# Altium PCB CH32V30xW-R0-1v0.PcbDoc (part 2 of 2)
Units mil, origin at the board's own origin, x right, y up, seen from the top; angles counter-clockwise.
Board outline 3543.31 x 3070.87 mil, 2 copper layers (Top Layer, Bottom Layer); 66 components, 88 nets, 346 pads, 719 vias.
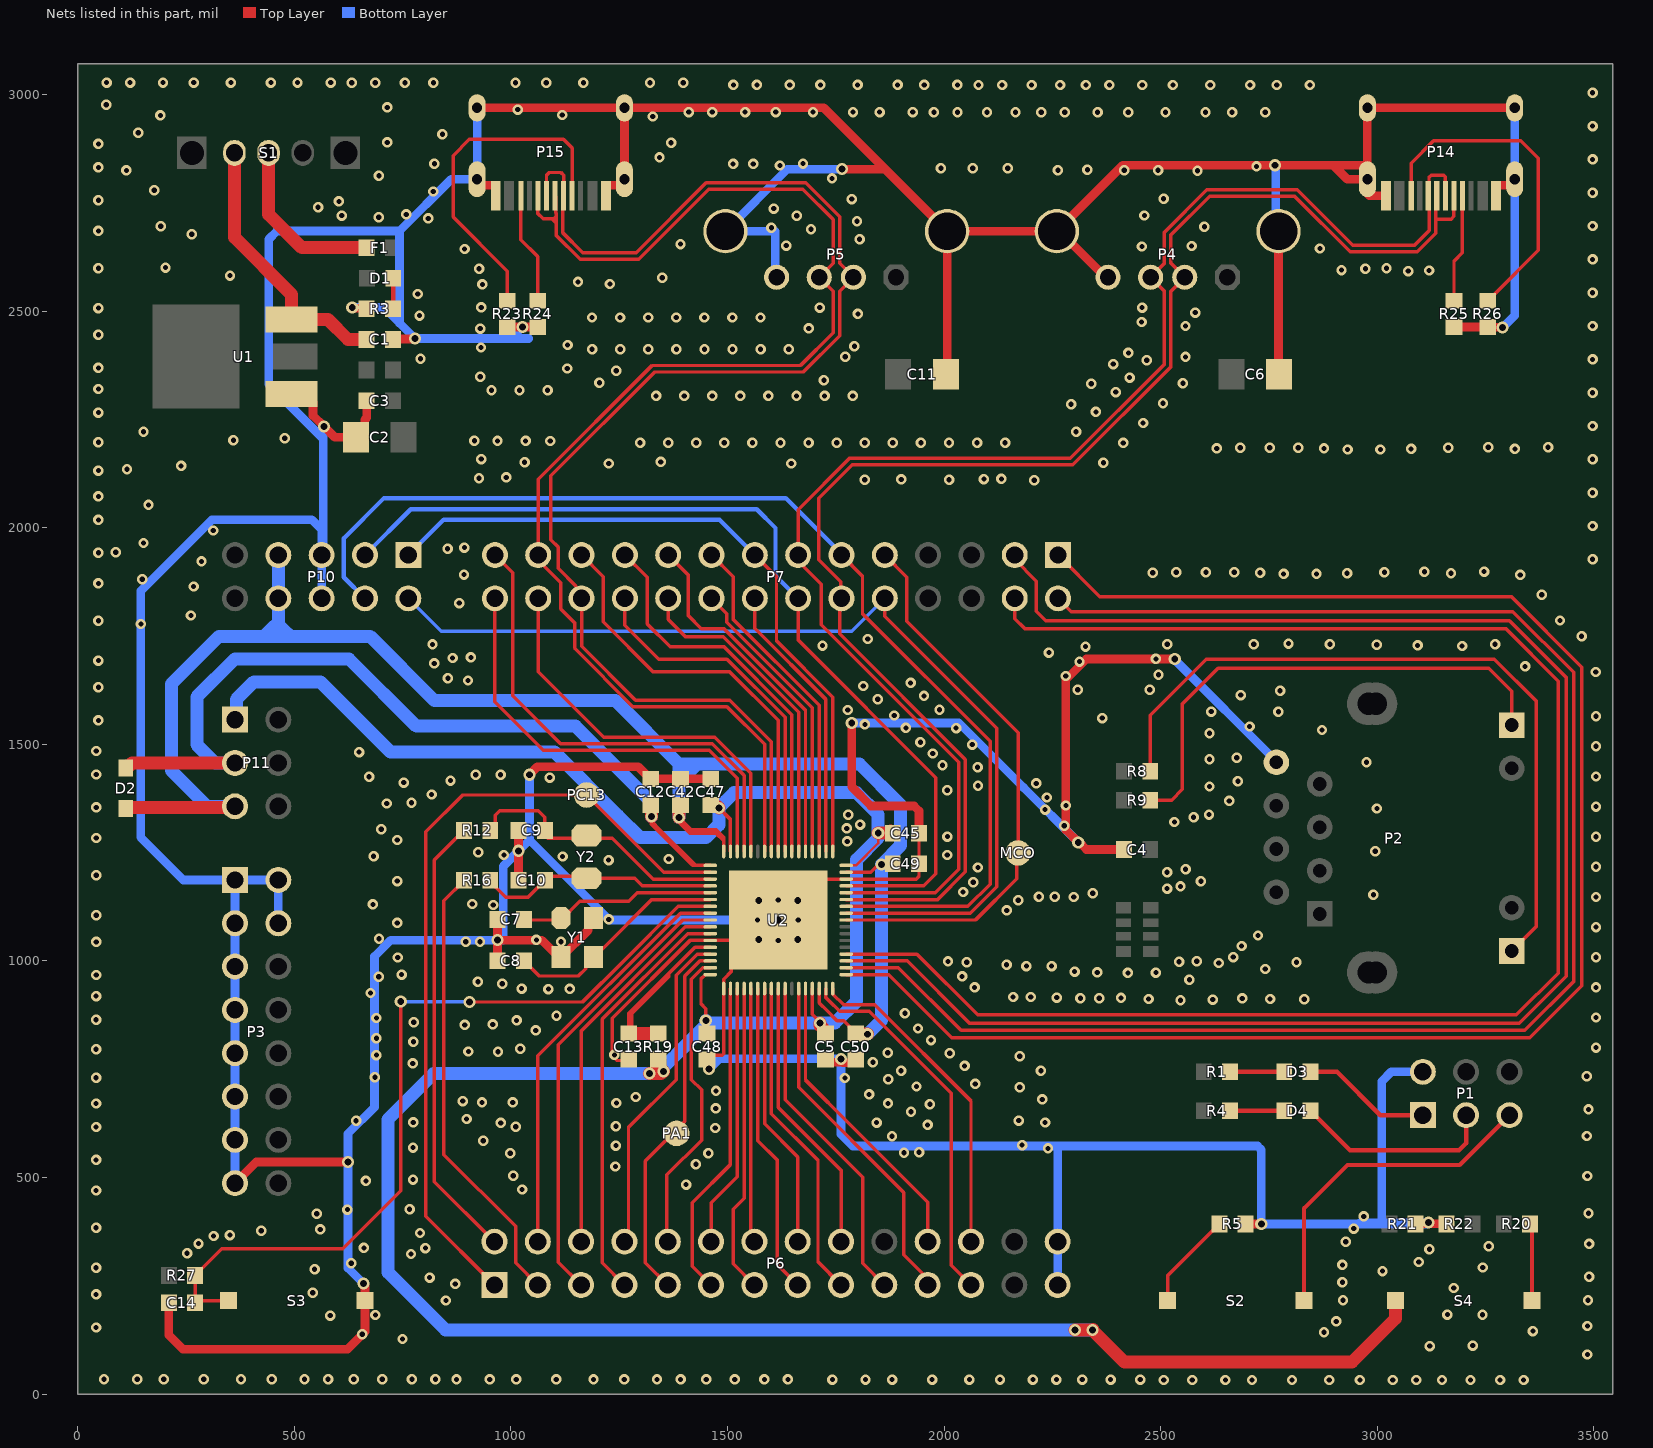
[diagram p2: the nets of this part, all layers, seen from the top]

## Via types
v1: diameter 24, hole 12, Top Layer to Bottom Layer, tented both sides, 662 vias
v2: diameter 28, hole 16, Top Layer to Bottom Layer, tented both sides, 57 vias

## Nets (pads, with @x,y where several pads share a name; then routed paths per layer and width w, separated by ;. In a path a pad name is that pad's centre, name@x,y a point inside that pad or via, vN(x,y) a via of type N, cw(c..) or ccw(c..) an arc to the next point about the centre after c; other vN are vias at no path point) (continued)
GND: C1.2 C2.2 C3.2 C4.1 C5.1 C6.2 C7.1 C8.1 C9.1 C10.1 C11.2 C12.1 C13.2 C14.1 C42.1 C45.2 C47.2 C48.2 C49.1 C50.2 P1.2 P2.8 P3.1 P3.2 P3.3 P3.4 P3.5 P3.7 P3.9 P3.11 P3.13 P3.15 P4.0 P4.4 P5.0 P5.4 P6.27 P6.28 P10.5 P10.6 P14.0 P14.A1 P14.B1 P15.0 P15.A1 P15.B1 R3.2 R5.1 R21.2 R22.2 R23.2 R24.2 R25.2 R26.2 S3.1 U1.1 U2.0 U2.12 U2.18 U2.49 Y1.2 Y1.4 | length 21484.4
  Top Layer w8: C13.2@1272.27,772.13 1270.31,770.17 1245.43,770.17 1234.02,781.57 1234.02,867.8 1413.47,1047.24 U2.12@1460.33,1047.24 U2.0@1569.86,1047.24 ; C48.2@1452.92,782.13 1487.61,782.13 1491.12,785.64 U2.18@1491.12,936.31 1491.12,957.77 1509.18,975.83 1509.18,986.56 U2.0@1569.86,1047.24 ; C45.2@1942.11,1294.49 C49.1@1942.11,1224.49 1942.11,1195.7 1935.38,1188.98 U2.49@1773.89,1188.98 1711.59,1188.98 U2.0@1662.12,1139.5 U2.0@1617.11,1094.49 U2.0@1572.09,1049.47 U2.0@1569.86,1047.24
  Top Layer w20: C14.1@210.37,211 210.37,136.41 243.22,103.56 622.7,103.56 663.07,143.93 S3.1@663.07,215.99 663.07,249.96 659.9,253.12 v2(659.9,255.29) ; P3.15@363.11,486.99 411.93,535.81 v2(624.09,535.81) ; U1.1@493.11,2309.25 523.11,2309.25 543.11,2289.25 543.11,2259.25 v2(568.33,2234.02) 593.56,2208.79 C2.2@642.33,2208.79 662.33,2228.79 662.33,2249.49 667.02,2254.18 C3.2@667.02,2293.47 ; v2(633.71,2508.57) 635.24,2507.04 665.35,2507.04 R3.2@667.02,2505.37 ; C1.2@727.65,2434.74 728.79,2435.87 777.31,2435.87 v2(778.45,2437.01) ; P15.0@921.95,2804.74 921.95,2799.95 930.9,2791 963.25,2791 965.06,2789.19 P15.B1@965.06,2766.56 ; P15.0@921.95,2969.31 P15.0@1262.11,2969.31 ; C8.1@969.2,1000.46 v2(969.2,1048.1) ; C7.1@969.2,1095.74 v2(969.2,1048.1) ; R23.2@991.75,2463.29 v2(1026.93,2463.29) R24.2@1062.11,2463.29 ; C10.1@1017.69,1193.12 v2(1017.69,1254.24) C9.1@1017.69,1283.12 ; v2(1042.76,1429.86) 1061.01,1448.12 1293.89,1448.12 1321.65,1420.35 C12.1@1322.64,1420.35 C42.1@1391.63,1420.35 C47.2@1461.63,1420.35 ; Y1.2@1115.58,1003.93 Y1.2@1115.58,1007.87 ; Y1.4@1190.39,1094.48 1178.73,1082.83 1178.73,1071.02 Y1.2@1115.58,1007.87 ; P15.A1@1219,2766.56 1219,2789.19 1220.81,2791 1253.16,2791 1262.11,2799.95 P15.0@1262.11,2804.74 P15.0@1262.11,2969.31 ; C48.2@1456.07,778.98 1456.07,751.9 v2(1457.6,750.37) ; C5.1@1726.06,772.13 1731.92,766.27 1761.87,766.27 v2@1761.87,769.2 ; v2(1761.87,774.01) v2@1761.87,769.2 ; v2(1764.46,2827.89) 1863.76,2827.89 P5.0@2007.11,2684.55 ; v2(1786.84,1549.38) 1786.84,1401.91 1831.17,1357.59 1930.74,1357.59 1942.11,1346.23 C45.2@1942.11,1294.49 ; C50.2@1796.06,772.13 1789.06,765.13 1765.94,765.13 v2@1761.87,769.2 ; C11.2@2004,2354.26 2007.11,2357.37 P5.0@2007.11,2684.55 ; P5.0@2037.11,2684.55 P4.0@2260.3,2684.55 ; P4.0@2300.3,2684.55 P4.0@2266.2,2684.55 ; P4.4@2378.41,2578.25 2372.5,2578.25 P4.0@2266.2,2684.55 ; C4.1@2415.29,1257.18 2328.53,1257.18 2311.92,1273.79 v2(2309.76,1273.79) 2281.19,1302.35 2281.19,1649.69 2328.49,1696.98 v2(2532.5,1696.98) ; R5.1@2696,392.95 2696.1,392.85 2732.18,392.85 v2(2732.28,392.75) ; P4.0@2772.11,2684.55 2772.11,2355.15 C6.2@2773,2354.26 ; P14.0@2968.44,2836.82 2898.44,2836.82 ; P14.0@2968.83,2804.07 2968.16,2804.74 2930.51,2804.74 2898.44,2836.82 ; P14.B1@3020.22,2766.56 2982.18,2766.56 2968.83,2779.9 2968.83,2796.47 P14.0@2977.11,2804.74 P14.0@2977.11,2969.31 P14.0@3317.26,2969.31 ; v2(3118.11,395.96) 3116.61,394.45 3090.13,394.45 R21.2@3088.63,392.95 R22.2@3159.37,392.95 ; R25.2@3177.11,2463.25 R26.2@3255.21,2463.25 3255.91,2462.55 3288.54,2462.55 v2(3289.24,2461.85) ; P14.A1@3274.15,2766.56 3274.15,2789.19 3275.96,2791 3308.32,2791 3317.26,2799.95 P14.0@3317.26,2804.74 ; v2(969.2,1048.1) 1071.41,1048.1 1099.99,1019.52 1103.93,1019.52 Y1.2@1115.58,1007.87 ; P15.0@1262.11,2969.31 1722.34,2969.31 P5.0@2007.11,2684.55 ; P4.0@2260.3,2684.55 P4.0@2266.2,2684.55 ; P4.0@2260.3,2684.55 2412.57,2836.82 v2(2764.24,2836.82) 2898.44,2836.82
  Bottom Layer w20: P3.15@363.11,486.99 P3.13@363.11,586.99 P3.11@363.11,686.99 P3.9@363.11,786.99 P3.7@363.11,886.99 P3.5@363.11,986.99 P3.3@363.11,1086.99 P3.1@363.11,1186.99 ; P3.4@463.11,1086.99 P3.2@463.11,1186.99 P3.1@363.11,1186.99 ; P10.6@563.11,1836.99 P10.5@563.11,1936.99 ; v2(568.33,2234.02) 566.8,2232.49 566.8,2205.35 ; v2(633.71,2508.57) 706.89,2508.57 742.67,2472.79 ; v2(659.9,255.29) 624.09,291.1 v2(624.09,535.81) 624.09,601.43 685.07,662.41 685.07,1010.31 722.86,1048.1 v2(969.2,1048.1) ; P15.0@921.95,2969.31 P15.0@921.95,2804.74 862.36,2804.74 742.67,2685.06 ; v2@982.2,1048.1 982.2,1218.76 v2(1017.69,1254.24) 1042.76,1279.31 ; v2(1026.93,2463.29) 1000.65,2437.01 ; 1040.65,2437.01 1000.65,2437.01 ; v2(1042.76,1429.86) 1042.76,1279.31 ; v2(1457.6,750.37) 1481.23,774.01 1761.85,774.01 1761.85,600.12 1789.22,572.75 2262.11,572.75 ; v1(1569.11,1094.49) 1227.58,1094.49 1042.76,1279.31 ; P5.4@1613.41,2578.25 1610.39,2581.26 1610.39,2684.55 P5.0@1495.3,2684.55 1638.64,2827.89 v2(1764.46,2827.89) ; v2(1786.84,1549.38) 2034.17,1549.38 2183.35,1400.19 v2(2309.76,1273.79) ; P6.27@2262.11,251.99 2262.11,572.75 ; v2(2532.5,1696.98) 2532.5,1695.04 2767.11,1460.43 P2.8@2767.11,1458.49 ; v2(2764.24,2836.82) 2765.77,2835.29 2765.77,2690.88 P4.0@2772.11,2684.55 ; 2959.96,395.96 3010.1,395.96 ; P1.2@3105.11,743.99 3032.36,743.99 3010.1,721.73 3010.1,395.96 ; v2(3118.11,395.96) v2@3115.94,395.96 ; v2(3289.24,2461.85) 3317.26,2489.88 P14.0@3317.26,2804.74 P14.0@3317.26,2969.31 ; P3.1@363.11,1186.99 243.46,1186.99 145.3,1285.15 145.3,1853.97 309.78,2018.45 540.61,2018.45 563.11,1995.95 P10.5@563.11,1936.99 ; P10.5@563.11,1936.99 566.8,1940.69 566.8,2205.35 ; 566.8,2205.35 441.19,2330.97 441.19,2666.23 460.01,2685.06 742.67,2685.06 ; 742.67,2472.79 v2(778.45,2437.01) 1000.65,2437.01 ; 742.67,2472.79 742.67,2685.06 ; 2262.11,572.75 2723.49,572.75 2732.28,563.96 v2(2732.28,392.75) 2959.96,392.75 3010.1,392.75 3112.74,392.75 v2@3115.94,395.96 ; 3010.1,395.96 v2@3115.94,395.96
  other v1: 2507.06,32.56 2572.8,32.56 2649.39,32.56 2710.83,32.56 2803.11,32.56 2889.07,32.56 2959.85,32.56 3035.7,32.56 3090.05,32.56 3149.46,32.56 3215.19,32.56 3283.45,32.56 3337.81,32.56 60.73,34.18 137.31,34.18 198.76,34.18 291.04,34.18 376.99,34.18 447.78,34.18 523.62,34.18 577.98,34.18 637.39,34.18 703.12,34.18 771.38,34.18 825.73,34.18 874.47,34.03 951.06,34.03 1012.5,34.03 1104.78,34.03 1190.73,34.03 1261.52,34.03 1337.37,34.03 1391.72,34.03 1451.13,34.03 1516.86,34.03 1585.12,34.03 1639.48,34.03 1742.05,33.56 1818.64,33.56 1880.08,33.56 1972.36,33.56 2058.32,33.56 2129.1,33.56 2204.95,33.56 2259.3,33.56 2318.71,33.56 2384.44,33.56 2452.7,33.56 3485.11,91.46 3120.94,110.98 3220.32,112.03 749.84,127.14 656.69,138.27 2876.95,143.05 3359.13,145.48 42.47,153.73 3485.11,157.2 2905.28,167.8 583,181.37 687.27,182.76 3242.93,183.02 3161.95,183.54 849.95,216.13 2920.83,216.77 3486.37,216.61 42.47,230.32 542.68,234.2 3176.68,245.07 871.57,254.51 2919.44,258.38 812.41,268.96 3488.9,270.96 3012.09,283.98 546.85,288.42 42.47,291.77 3243.46,292.39 2919.44,298.38 631.66,302.33 3095.7,305.01 769.45,323.53 252.63,325 3120.41,334.46 802.67,337.09 660.66,337.64 3257.13,341.29 278.74,347.48 3488.9,346.81 2927.06,351.7 313.74,365.07 351.27,367.07 790.16,371.85 423.81,377.22 560.1,380.17 2945.63,382.18 42.47,384.04 2968.96,410.27 551.78,416.22 3487.64,417.59 622.48,425.92 766.12,426.93 42.47,470 1025.93,472.46 1404.45,483.73 665.34,492.21 773.93,495.13 1005.24,504 3485.11,503.55 1241.27,525.51 1427.14,530.62 42.47,540.79 998.34,556.23 1455.88,555.83 1907.45,557.12 1942.29,558.3 2239.77,567.36 773.93,569.01 1242.31,573.74 2180.06,574.96 936.25,584.81 1879.69,595.5 3483.85,595.83 1471.51,614.31 42.47,616.63 1011.15,617.34 1242.31,618.21 1961.94,621.46 976.66,626.21 774.64,627.26 1844.26,626.8 2233.25,627.07 642.7,631.17 2172.47,631.41 897.81,635.08 1923.64,651.7 3487.53,657.27 1473.02,659.69 1967.32,669.17 42.47,670.98 1870.55,671.19 1243.64,671.97 933.29,673.51 1004.25,673.51 888.94,676.47 2226.74,680.26 1288.1,685.9 1826.87,692.02 1473.52,700.02 2174.64,708.48 1936.41,710.16 2071.76,716.08 1871.14,726.69 42.47,730.4 1771.1,729.65 686.15,731.32 3483.7,733.86 1900.79,746.45 2223.48,746.47 2047.3,757.68 773.32,763.58 1835.61,765.94 2174.64,780.12 689.58,782.72 1238.98,782.99 2013.04,787.04 1869.88,788.12 970.25,790.16 901.85,791 42.47,796.13 1021.44,797.29 3504.96,799.93 774.89,813.31 1969.82,817.21 689.58,821.55 1057.53,839.67 1939.64,844.13 893.46,852.26 958.08,853.52 775.52,858.64 1013.05,862.75 42.47,864.39 689.58,868.38 3504.96,869.48 1105.36,873.24 1909.47,879.2 2545.81,909.24 2620.32,910.65 2831.19,911.35 2472,912.05 2752.47,912.05 2688.5,913.46 2314.68,913.91 2358.04,913.91 2260.13,915.31 2408.4,914.61 2159.41,916.71 2199.98,916.71 42.47,918.74 675.83,926.05 1086.47,934.99 1136.07,935.47 1024.75,936.04 2070.38,939.01 3504.96,939.03 979.85,947.27 923.72,951.95 2566.29,956.65 694.85,963.46 2041.51,964.41 42.62,967.48 747.6,968.37 2424.36,972.5 2489.03,973.08 2353.33,973.65 2301.36,975.39 2741.38,981.44 2189.91,988.09 2248.24,988.09 2144.3,990.98 2633.91,995.35 2052.48,996.75 2813.44,996.93 2542.42,998.19 2008.97,998.85 2583.2,999.25 739.01,1007.98 2667.6,1008.83 3504.96,1008.57 2686.75,1034.36 42.62,1044.06 895.92,1044.42 928.6,1044.07 1115.58,1044.52 1617.11,1047.49 1058.83,1048.63 695.46,1051.17 2724.7,1058.83 3504.96,1078.12 737.5,1087.84 1663.11,1094.49 1226.04,1095.99 42.62,1105.51 2144.5,1116.72 959.11,1129.03 681.47,1130.44 910.72,1131.34 1617.11,1140.49 2171.18,1140.31 2218.89,1148.01 2255.32,1148.01 2299.44,1147.5 3504.96,1147.66 2991.1,1152.58 2343.04,1156.22 2043.9,1159.02 2514.9,1166.99 2545.69,1172.12 2067.17,1181.56 737.5,1184.26 2592.88,1183.92 42.62,1197.78 2514.9,1204.96 2557.48,1211.62 2077.93,1215.74 3504.96,1217.21 1225.42,1232.86 1364.48,1235.22 683.1,1241.47 1119.26,1241.02 983.73,1244.64 2007.07,1244.57 924.63,1251.06 2995.12,1253.25 1776.28,1275.89 737.5,1279.18 42.62,1283.74 2007.55,1287.06 3504.96,1286.76 700.92,1304.09 1775.49,1306.02 2277.53,1312.16 1806.04,1314.73 2531.69,1320.78 2576.07,1331.7 1778.55,1337.26 2611.58,1337.85 2233.14,1349.27 2999.15,1351.91 42.62,1354.53 3504.96,1356.3 2281.16,1358.73 713.4,1363.55 770.65,1365.06 2658.19,1369.5 2237.34,1377.35 816.86,1384.18 2007.07,1394.02 2612.73,1402.63 2078.28,1404.24 2212.65,1409.91 752.57,1411.76 2678.3,1414.75 860.51,1416.21 1089.61,1423.11 672.72,1425.32 3504.96,1425.85 42.62,1430.37 918.74,1430 976.21,1430 2077.28,1447.1 1996.32,1451.62 2974.99,1458.63 2612.73,1465.62 2675.79,1469.21 1973.86,1478.84 649.53,1482.19 42.62,1484.73 3504.96,1495.39 2065,1499.34 1945.27,1504.71 2612.73,1525.6 2872.3,1533.13 2027.64,1537.38 1911.75,1538.07 2705.17,1541.19 1817.19,1546.01 47.7,1555.19 2365.3,1560.68 3504.96,1564.94 1884.85,1566.57 2771.62,1575.42 2616.73,1575.59 1777.72,1579.31 1989.32,1580.07 1846.66,1603.98 1953.63,1611.8 2685.04,1613.67 2775.65,1623.74 2308.47,1625.84 2474.82,1625.84 47.7,1631.77 1813.22,1634.68 1922.7,1641.94 900.9,1647.33 854.6,1652.52 2280.74,1657.72 2494.98,1660.58 3504.2,1667.06 3341.26,1679.9 823.07,1686.84 2312.62,1690.99 47.7,1693.22 2488.96,1697.24 865.38,1699.22 907.68,1700.81 2241.92,1711.79 2326.49,1725.65 3195.7,1727.04 1719.4,1727.89 3093.12,1728.42 2998.85,1729.81 819.08,1730.75 2515.03,1731.2 2714.65,1731.2 2890.71,1731.2 3271.95,1731.2 2795.06,1732.58 1823.72,1743.12 3471.65,1749.4 145.78,1777.76 47.7,1785.5 3421.87,1785.77 261.34,1797.53 880.95,1825.96 3379.74,1845.13 267.43,1864.44 47.7,1871.45 148.82,1881.16 3329.96,1891.08 891.78,1891.82 2783.78,1893.54 2859.62,1893.54 2930.41,1894.8 3170.09,1894.91 2481.67,1896.07 2729.42,1896.07 2536.02,1897.33 2604.28,1897.33 2670.01,1897.33 3016.37,1897.33 3108.64,1898.6 3246.68,1898.74 285.67,1922.22 3496.95,1927.08 47.7,1942.24 87.99,1943.51 853.89,1951.36 892.68,1954.07 151.86,1964.8 313.04,1993.69 3496.95,2004.02 47.7,2018.08 163.38,2052.8 47.7,2072.44 3496.95,2080.95 2208,2109.71 1817.04,2110.74 2011.51,2110.74 1901,2111.58 2091.92,2112.34 2132.37,2112.86 926.43,2114.17 989.28,2116.23 47.7,2131.85 113.84,2135.1 238.55,2142.79 1225.66,2148.22 1647.11,2148.22 2367.81,2150.02 1031.52,2151.27 1345.89,2152.01 931.58,2158.48 3496.95,2157.89 2931.38,2180.69 3007.22,2180.69 3078.01,2181.95 3317.69,2182.06 2629.27,2183.22 2877.02,2183.22 2683.62,2184.48 2751.88,2184.48 2817.61,2184.48 3163.97,2184.48 3256.24,2185.75 3394.28,2185.89 1298.19,2196.22 1363.02,2196.22 1427.85,2196.22 1492.67,2196.22 1557.5,2196.22 1622.32,2196.22 1687.15,2196.22 1751.97,2196.22 1816.8,2196.22 1881.63,2196.22 1946.45,2196.22 2011.28,2196.22 2076.1,2196.22 2140.93,2196.22 2413.65,2195.85 47.7,2197.58 1090.61,2200.27 915.74,2200.69 969.02,2200.58 1033.85,2200.58 359.29,2202.02 477.75,2206.57 151.86,2221.78 2304.69,2221.54 3496.95,2234.83 2459.49,2241.69 47.7,2265.84 2350.53,2267.38 2293.14,2285.07 2505.32,2287.53 1335.14,2304.3 1399.97,2304.3 1464.79,2304.3 1529.62,2304.3 1594.44,2304.3 1659.27,2304.3 1724.1,2304.3 1788.92,2304.3 3496.95,2311.77 2396.37,2313.22 955.1,2317.45 1019.92,2317.45 1084.75,2317.45 47.7,2320.19 2339.73,2332.24 2551.16,2333.37 1204.34,2334.67 1722.46,2340.28 2428.31,2346.62 929.22,2348.4 1243.24,2362.33 1130,2367.51 47.86,2368.93 2390.35,2377.68 2468,2386.88 3496.95,2388.71 791.39,2389.95 2557.16,2394.36 1771.92,2394.83 2425.43,2403.56 1187.49,2412.17 1252.31,2412.17 1317.14,2412.17 1381.96,2412.17 1446.79,2412.17 1511.62,2412.17 1576.44,2412.17 1641.27,2412.17 931.01,2416.13 1793.01,2418.83 1130.86,2421.97 47.86,2445.52 929.34,2459.72 1687.56,2460.28 2557.16,2465.69 3496.95,2465.65 2455.92,2474.89 1187.26,2485.28 1252.09,2485.28 1316.91,2485.28 1381.74,2485.28 1446.56,2485.28 1511.39,2485.28 1576.22,2485.28 788.89,2489.68 1801.01,2493.74 2579.73,2496.58 47.86,2506.96 1713.01,2508.28 2457.07,2508.25 931.44,2508.59 785.15,2539.55 3496.95,2542.59 934.23,2561.66 1228.52,2562.6 1154.92,2567.41 1349.59,2577.04 351.67,2582.07 3071.71,2592.5 3119.64,2593.82 2917.38,2594.77 926.57,2597.83 2972.57,2598.1 47.86,2599.24 3021.31,2598.96 202.63,2600.47 3496.95,2619.53 893.03,2643.36 2867.46,2644.69 2456.69,2649.23 2571.29,2650.37 1635.74,2651.33 1391.55,2654.77 1805.05,2665.78 263.35,2677.75 47.86,2685.19 1692.83,2689.17 1601.35,2692.61 2600.8,2694.62 191.59,2696.14 3496.95,2696.47 1798.97,2707.6 809.39,2714.01 695.08,2716.8 1659.82,2720.12 609.57,2720.52 2462.36,2720.72 758.27,2723.31 1606.85,2736.63 554.86,2739.98 603.01,2753.29 47.86,2755.98 1786.8,2758.55 2506.61,2759.3 3496.95,2773.4 820.54,2776.28 176.87,2778.94 1741.17,2806.46 695.2,2812.71 2584.91,2823.98 112.48,2824.94 2262.65,2825.11 2415.84,2825.11 2494.13,2825.11 2330.73,2826.25 1992.59,2829.65 2066.34,2829.65 2146.91,2829.65 47.86,2831.83 2721.08,2834.19 1621.02,2836.12 823.33,2840.41 1513.04,2839.92 1559.43,2839.92 1674.26,2840.68 3496.95,2850.34 1342.95,2854.99 47.86,2886.18 1369.88,2888.65 714.66,2889.53 841.92,2908.26 139.68,2911.7 3496.95,2927.28 1327.24,2949.25 190.99,2951.86 1118.51,2952.85 1410.53,2959.48 1464.89,2959.48 1540.73,2959.48 1611.52,2959.48 1697.48,2959.48 1789.75,2959.48 1851.2,2959.48 1927.78,2959.48 1976.52,2959.32 2030.87,2959.32 2099.13,2959.32 2164.87,2959.32 2224.28,2959.32 2278.63,2959.32 2354.47,2959.32 2425.26,2959.32 2511.22,2959.32 2603.5,2959.32 2664.94,2959.32 2741.53,2959.32 1015.64,2965.24 714.66,2970.46 66.07,2976.4 3496.95,3004.22 1513.51,3022.31 1567.86,3022.31 1643.7,3022.31 1714.49,3022.31 1800.45,3022.31 1892.72,3022.31 1954.17,3022.31 2030.76,3022.31 2079.49,3022.15 2133.85,3022.15 2202.11,3022.15 2267.84,3022.15 2327.25,3022.15 2381.6,3022.15 2457.45,3022.15 2528.23,3022.15 2614.19,3022.15 2706.47,3022.15 2767.91,3022.15 2844.5,3022.15 632.66,3027.39 687.02,3027.39 755.28,3027.39 821.01,3027.39 1010.62,3027.39 1081.4,3027.39 1167.36,3027.39 1321.08,3027.39 1397.67,3027.39 66.68,3027.54 121.03,3027.54 196.87,3027.54 267.66,3027.54 353.62,3027.54 445.89,3027.54 507.34,3027.54 583.93,3027.54
KEY: P1.5 S2.1 | length 776.3
  Top Layer w10: S2.1@2830.75,215.99 2830.75,428.73 2931.07,529.05 3190.16,529.05 P1.5@3305.11,643.99
LED1: D3.2 P1.1 | length 300.8
  Top Layer w10: D3.2@2845.74,743.99 2907.08,743.99 3007.08,643.99 P1.1@3105.11,643.99
LED2: D4.2 P1.3 | length 469.3
  Top Layer w10: D4.2@2845.74,653.99 2845.74,653 2859.04,639.7 2860.03,639.7 2936.97,562.75 3188.6,562.75 3205.04,579.19 3205.04,643.92 P1.3@3205.11,643.99
MCO: MCO.1 P7.9 U2.43 | length 1308.1
  Top Layer w8: U2.43@1773.89,1094.49 2072.5,1094.49 2167.96,1189.95 MCO.1@2167.96,1249.31 ; P7.9@1863.11,1936.99 1914.04,1886.05 1914.04,1783.72 2170.88,1526.89 MCO.1@2170.88,1249.31
NetC1_1: C1.1 S1.2 U1.3 | length 631.7
  Top Layer w30: S1.2@361.84,2865.37 361.84,2670.28 493.11,2539.01 U1.3@493.11,2481.25 577.27,2481.25 623.79,2434.74 C1.1@667.02,2434.74
NetD1_2: D1.2 R3.1 | length 70.9
  Top Layer w10: R3.1@727.65,2505.37 728.34,2506.06 D1.2@728.34,2576.01
NetD3_1: D3.1 R1.2 | length 125
  Top Layer w10: R1.2@2660.11,743.99 D3.1@2785.11,743.99
NetD4_1: D4.1 R4.2 | length 125
  Top Layer w10: R4.2@2660.11,653.99 D4.1@2785.11,653.99
NetF1_2: F1.2 S1.1 | length 400.1
  Top Layer w30: S1.1@440.58,2865.37 440.58,2723.61 517.54,2646.64 F1.2@667.02,2646.64
NetP2_9: P2.9 R8.2 | length 1714.5
  Top Layer w8: R8.2@2475.92,1437.8 2475.92,1566.82 2605.47,1696.37 3270.22,1696.37 3367.43,1599.15 3367.43,1080.2 P2.9@3310.1,1022.86
NetP2_12: P2.12 R9.2 | length 1175.7
  Top Layer w8: R9.2@2475.92,1371.1 2525.16,1371.1 2550.19,1396.13 2550.19,1593.2 2632.28,1675.3 3257.63,1675.3 3310.1,1622.83 P2.12@3310.1,1544.52
NetP14_A5: P14.A5 R25.1 | length 250.7
  Top Layer w8: R25.1@3177.11,2523.88 3177.11,2615.23 3196.4,2634.52 P14.A5@3196.4,2766.56
NetP14_B5: P14.B5 R26.1 | length 784.8
  Top Layer w8: P14.B5@3078.29,2766.56 3078.29,2841.75 3129.85,2893.31 3331.37,2893.31 3371.97,2852.71 3371.97,2640.65 3270.5,2539.17 3270.5,2538.19 3256.19,2523.88 R26.1@3255.21,2523.88
NetP15_A5: P15.A5 R23.1 | length 795.6
  Top Layer w8: R23.1@991.75,2523.92 991.75,2592.05 866.48,2717.32 866.48,2859.12 903.81,2896.45 1121.38,2896.45 1141.24,2876.58 P15.A5@1141.24,2766.56
NetP15_B5: P15.B5 R24.1 | length 258.8
  Top Layer w8: P15.B5@1023.13,2766.56 1023.13,2665.15 1062.11,2626.17 R24.1@1062.11,2523.92
NetR5_2: R5.2 S2.2 | length 227.1
  Top Layer w8: S2.2@2515.79,215.99 2515.79,273.37 2620.08,377.66 2621.06,377.66 2635.37,391.96 R5.2@2635.37,392.95
NetR20_2: R20.2 S4.2 | length 178.8
  Top Layer w10: R20.2@3352.49,392.95 3356.96,388.48 S4.2@3356.96,215.99
NRST: C14.2 R27.1 S3.2 U2.7 | length 1942
  Top Layer w8: S3.2@348.11,215.99 275.99,215.99 C14.2@271,211 R27.1@271,274 271,274.98 285.31,289.29 286.29,289.29 332.57,335.57 611.38,335.57 745.76,469.95 v2(745.76,906.68) ; v2(904.17,905.2) 1165.36,905.2 1258.66,998.5 1386.14,1125.98 U2.7@1460.33,1125.98
  Bottom Layer w8: v2(745.76,906.68) 746.5,905.94 903.43,905.94 v2(904.17,905.2)
PA0: P6.8 U2.14 | length 763.4
  Top Layer w8: P6.8@1262.11,351.99 1271.5,361.38 1271.5,615.83 1381.5,725.83 1381.5,966.78 1430.46,1015.75 U2.14@1460.33,1015.75
PA1: P6.9 PA1.1 U2.15 | length 845.4
  Top Layer w8: P6.9@1362.11,251.99 1310.47,303.62 1310.47,538.2 1401.73,629.46 1401.73,965.15 1436.58,1000 U2.15@1460.33,1000
PA2: P6.10 U2.16 | length 704.4
  Top Layer w8: P6.10@1360.15,350.87 1360.15,505.98 1440.25,586.08 1440.25,702.51 1416.73,726.03 1416.73,957.85 1443.08,984.19 1460.26,984.19 U2.16@1460.33,984.25
PA3: P6.11 U2.19 | length 738.8
  Top Layer w8: P6.11@1462.11,251.99 1418.74,295.35 1418.74,442.06 1506.87,530.19 U2.19@1506.87,936.31
PA4: P6.12 U2.20 | length 609.4
  Top Layer w8: P6.12@1462.11,351.99 1462.11,441.56 1522.62,502.08 U2.20@1522.62,936.31
PA5: P6.13 U2.21 | length 715
  Top Layer w8: U2.21@1538.37,936.31 1538.37,452.22 1513.15,427.01 1513.15,300.95 P6.13@1562.11,251.99
PA6: P6.14 U2.22 | length 587.6
  Top Layer w8: U2.22@1554.11,936.31 1554.18,936.24 1554.18,359.92 P6.14@1562.11,351.99
PA7: P6.15 U2.23 | length 722.5
  Top Layer w8: U2.23@1569.86,936.31 1569.86,585.1 1615.35,539.61 1615.35,298.74 P6.15@1662.11,251.99
PA9: P7.10 P10.2 U2.44 | length 2308.7
  Top Layer w8: U2.44@1773.89,1110.24 2060.39,1110.24 2121.3,1171.15 2121.3,1537.51 1863.11,1795.7 P7.10@1863.11,1836.99
  Bottom Layer w8: P10.2@763.11,1836.99 839.48,1760.61 1786.73,1760.61 P7.10@1863.11,1836.99
PA10: P7.11 P10.4 U2.45 | length 2657.7
  Top Layer w8: P7.11@1763.11,1936.99 1811.65,1888.44 1811.65,1801.76 2106.3,1507.11 2106.3,1177.36 2054.93,1125.98 U2.45@1773.89,1125.98
  Bottom Layer w10: P10.4@663.11,1836.99 614.17,1885.93 614.17,1975.39 707.23,2068.46 1634.38,2068.46 1763.11,1939.73 P7.11@1763.11,1936.99
PA11: P4.2 P7.12 P14.A7 P14.B7 U2.46 | length 3476.6
  Top Layer w8: U2.46@1773.89,1141.73 1985.22,1141.73 2049.07,1205.58 2049.07,1464.93 1758.92,1755.07 1758.92,1832.8 P7.12@1763.11,1836.99 1761.88,1838.22 1761.88,1874.99 1710.37,1926.5 1710.37,2067.66 1787.74,2145.03 2297.34,2145.03 2523.7,2371.39 2523.7,2546.38 P4.2@2555.57,2578.25 2523.7,2610.12 2523.7,2676.18 2612.99,2765.47 2808.98,2765.47 2937.21,2637.24 3092.22,2637.24 3135,2680.02 3135,2712.31 ; P14.A7@3137.34,2766.56 3135.44,2764.65 3135.44,2727.01 3135,2726.57 3135,2712.31 ; P14.B7@3176.71,2766.56 3176.71,2718.74 3170.28,2712.31 3143.56,2712.31 3140.1,2712.31 3135,2712.31
PA12: P4.3 P7.13 P14.A6 P14.B6 U2.47 | length 3509.4
  Top Layer w8: U2.47@1773.89,1157.48 1785.57,1157.48 1785.95,1157.11 1979.38,1157.11 2034.07,1211.79 2034.07,1458.71 1716.87,1775.9 1716.87,1788.52 1716.37,1789.02 1716.37,1869.3 1676.77,1908.91 1676.77,1909.26 1663.11,1922.92 1663.11,2041.61 1781.52,2160.03 2291.13,2160.03 2508.7,2377.6 2508.7,2546.38 P4.3@2476.83,2578.25 2508.7,2610.12 2508.7,2682.39 2606.78,2780.47 2815.2,2780.47 2943.43,2652.24 3086.01,2652.24 3120,2686.23 3120,2726.57 3119.56,2727.01 3119.56,2764.65 3119.42,2764.79 3119.42,2809 3124.25,2813.84 3153.51,2813.84 3157.03,2810.32 P14.A6@3157.03,2766.56
PA13: P7.14 P10.3 U2.48 | length 2179.4
  Top Layer w8: P7.14@1663.11,1836.99 1663.11,1740.77 1980.75,1423.13 1980.75,1201.2 1952.77,1173.23 U2.48@1773.89,1173.23
  Bottom Layer w10: P10.3@663.11,1936.99 768.84,2042.73 1567.54,2042.73 1610.96,1999.31 1610.96,1889.14 P7.14@1663.11,1836.99
PA14: P7.15 P10.1 U2.52 | length 1626.5
  Top Layer w8: P7.15@1563.11,1936.99 1613.14,1886.96 1613.14,1738.89 1743.09,1608.94 U2.52@1743.09,1252.67
  Bottom Layer w10: P10.1@763.11,1936.99 844.72,2018.61 1481.49,2018.61 P7.15@1563.11,1936.99
PA15: P7.16 U2.53 | length 652.3
  Top Layer w8: P7.16@1563.11,1836.99 1563.11,1767.71 1727.34,1603.48 U2.53@1727.34,1252.67
PB0: P6.18 U2.26 | length 644.4
  Top Layer w8: U2.26@1617.11,936.31 1617.11,661.71 1762.11,516.71 P6.18@1762.11,351.99
PB1: P6.19 U2.27 | length 779.3
  Top Layer w8: U2.27@1632.85,936.31 1632.85,679.74 1811.97,500.63 1811.97,302.13 P6.19@1862.11,251.99
PB3: P7.21 U2.58 | length 916.9
  Top Layer w8: P7.21@1263.11,1936.99 1314.58,1885.52 1314.58,1777.86 1367.6,1724.83 1492,1724.83 1648.6,1568.23 U2.58@1648.6,1252.67
PB4: P7.22 U2.59 | length 829.7
  Top Layer w8: P7.22@1263.11,1836.99 1263.11,1775.15 1341.48,1696.78 1498.84,1696.78 1632.85,1562.77 U2.59@1632.85,1252.67
PB5: P7.23 U2.60 | length 975.8
  Top Layer w8: P7.23@1163.11,1936.99 1213.03,1887.07 1213.03,1783.1 1329.05,1667.08 1505.54,1667.08 1617.11,1555.52 U2.60@1617.11,1252.67
PB6: P5.2 P7.24 P15.A7 P15.B7 U2.61 | length 3290.1
  Top Layer w8: P15.A7@1082.18,2766.56 1082.18,2814.09 1088.16,2820.07 1115.54,2820.07 1121.56,2814.06 P15.B7@1121.56,2766.56 1119.65,2764.65 1119.65,2727.01 1119.21,2726.57 1119.21,2713.28 1119.21,2681.53 1165.97,2634.77 1288.95,2634.77 1450.37,2796.18 1680.19,2796.18 1758.7,2717.68 1758.7,2610.12 P5.2@1790.57,2578.25 1758.7,2546.38 1758.7,2443.56 1674.7,2359.56 1331.95,2359.56 1092.18,2119.79 1092.18,1972.66 1109.26,1955.58 1109.26,1906.13 1149.88,1865.51 1149.88,1864.28 1163.11,1851.06 1163.11,1726.61 1287.69,1602.03 1505.01,1602.03 1600.98,1506.05 1600.98,1264.73 1601.36,1264.35 U2.61@1601.36,1252.67
PB7: P5.3 P7.25 P15.A6 P15.B6 U2.62 | length 3258.5
  Top Layer w8: P15.B6@1062.5,2766.56 1062.5,2725.11 1074.33,2713.28 1094.91,2713.28 ; P7.25@1063.11,1925.03 1115.05,1873.08 1115.05,1812.39 1146.91,1780.54 1146.91,1722.42 1148.11,1721.22 1148.11,1720.4 1281.48,1587.03 1498.79,1587.03 1585.98,1499.84 1585.98,1264.73 1585.61,1264.35 U2.62@1585.61,1252.67 ; P7.25@1063.11,1936.99 1062.97,1937.12 1062.97,2111.8 1325.74,2374.56 1668.48,2374.56 1743.7,2449.78 1743.7,2546.38 P5.3@1711.83,2578.25 1743.7,2610.12 1743.7,2711.46 1673.98,2781.18 1456.58,2781.18 1295.17,2619.77 1159.76,2619.77 1104.21,2675.32 1104.21,2704.22 1104.21,2713.28 ; P15.A6@1101.87,2766.56 1103.78,2764.65 1103.78,2727.01 1104.21,2726.57 1104.21,2718.28 1104.21,2713.28 ; 1103.36,2718.28 1098.36,2713.28 ; 1103.97,2704.22 1094.91,2713.28 ; 1094.91,2713.28 1098.36,2713.28 ; 1098.36,2713.28 1104.21,2713.28
PB8: P7.26 U2.64 | length 938.1
  Top Layer w8: P7.26@1063.11,1836.99 1063.11,1667.85 1214.18,1516.78 1470.87,1516.78 1554.11,1433.54 U2.64@1554.11,1252.67
PB9: P7.27 U2.65 | length 1127.7
  Top Layer w8: P7.27@963.11,1936.99 1004.11,1895.99 1004.11,1612.15 1114.48,1501.78 1464.66,1501.78 1538.37,1428.07 U2.65@1538.37,1252.67
PB10: P6.21 U2.29 | length 807.7
  Top Layer w8: U2.29@1664.35,936.31 1664.35,708.01 1906.9,465.46 1906.9,321.37 1948.33,279.95 1948.33,279.84 1962.11,266.06 P6.21@1962.11,251.99
PB11: P6.22 U2.30 | length 701.1
  Top Layer w8: U2.30@1680.1,936.31 1680.1,725.18 1787.28,617.99 1962.11,443.17 P6.22@1962.11,351.99
PB12: P7.1 U2.35 | length 3859.6
  Top Layer w8: U2.35@1773.89,968.5 1872.31,968.5 2017.75,823.07 3352.28,823.07 3472.14,942.93 3472.14,1678.18 3309.87,1840.45 2359.64,1840.45 P7.1@2263.11,1936.99
PB13: P7.2 U2.36 | length 3760.2
  Top Layer w8: U2.36@1773.89,984.25 1894.45,984.25 2039.06,839.64 3340.29,839.64 3453.08,952.43 3453.08,1666.1 3313.04,1806.15 2293.95,1806.15 P7.2@2263.11,1836.99
PB14: P7.3 U2.37 | length 3893.6
  Top Layer w8: U2.37@1773.89,1000 1914.75,1000 2058.54,856.21 3327.92,856.21 3436.2,964.49 3436.2,1654.35 3305.17,1785.39 2234.75,1785.39 2212.99,1807.14 2212.99,1876.93 2163.11,1926.82 P7.3@2163.11,1936.99
PB15: P7.4 U2.38 | length 3776.9
  Top Layer w8: U2.38@1773.89,1015.75 1937.34,1015.75 2077.65,875.44 3321.25,875.44 3417.54,971.73 3417.54,1645.89 3296.1,1767.33 2185.84,1767.33 2163.11,1790.06 P7.4@2163.11,1836.99
PC0: P6.4 U2.8 | length 963.4
  Top Layer w8: P6.4@1062.11,351.99 1062.11,780.73 1391.61,1110.24 U2.8@1460.33,1110.24
PC1: P6.5 U2.9 | length 1046.6
  Top Layer w8: P6.5@1162.11,251.99 1109.53,304.57 1109.53,806.94 1397.08,1094.49 U2.9@1460.33,1094.49
PC2: P6.6 U2.10 | length 884.1
  Top Layer w8: P6.6@1162.11,351.99 1162.11,838.31 1402.54,1078.74 U2.10@1460.33,1078.74
PC3: P6.7 U2.11 | length 966.2
  Top Layer w8: P6.7@1262.11,251.99 1210.87,303.23 1210.87,865.85 1408.01,1062.99 U2.11@1460.33,1062.99
PC4: P6.16 U2.24 | length 616
  Top Layer w8: U2.24@1585.61,936.31 1585.61,623.92 1662.11,547.42 P6.16@1662.11,351.99
PC5: P6.17 U2.25 | length 750.9
  Top Layer w8: U2.25@1601.36,936.31 1601.36,647.15 1708.9,539.61 1708.9,305.2 P6.17@1762.11,251.99
PC10: P7.17 U2.54 | length 787.2
  Top Layer w8: P7.17@1463.11,1936.99 1513.6,1886.49 1513.6,1788.09 1711.59,1590.09 U2.54@1711.59,1252.67
PC11: P7.18 U2.55 | length 680.7
  Top Layer w8: P7.18@1463.11,1836.99 1498.6,1801.49 1498.6,1781.87 1695.85,1584.63 U2.55@1695.85,1252.67
PC12: P7.19 U2.56 | length 846.3
  Top Layer w8: P7.19@1363.11,1936.99 1409.89,1890.2 1409.89,1796.99 1439.65,1767.23 1492.03,1767.23 1680.1,1579.16 U2.56@1680.1,1252.67
PC13: P6.1 PC13.1 U2.2 | length 1877.5
  Top Layer w8: P6.1@962.11,251.99 803.78,410.32 803.78,1298.03 888.84,1383.09 PC13.1@1174.94,1383.09 1174.94,1382.69 1352.91,1204.72 U2.2@1460.33,1204.72
PC14: P6.2 R12.1 | length 1035.6
  Top Layer w8: R12.1@891.69,1301.31 891.69,1300.32 877.38,1286.02 876.4,1286.02 823.42,1233.04 823.42,490.67 P6.2@962.11,351.99
PC15: P6.3 R16.1 | length 1047.5
  Top Layer w8: R16.1@884.72,1189.16 R16.1@887.69,1192.13 ; R16.1@891.69,1186.19 891.69,1185.21 845.2,1138.72 845.2,552.88 1010.79,387.29 1010.79,303.31 P6.3@1062.11,251.99
PD2: P7.20 U2.57 | length 759.9
  Top Layer w8: P7.20@1363.11,1836.99 1363.11,1788.18 1402.97,1748.32 1489.73,1748.32 1664.35,1573.7 U2.57@1664.35,1252.67
PD8: P6.23 U2.33 | length 863
  Top Layer w8: U2.33@1727.34,936.31 1727.34,915.4 1735.39,907.35 1759.34,883.41 1827.62,883.41 2016.38,694.65 2016.38,297.72 P6.23@2062.11,251.99
PD9: P6.24 U2.34 | length 758.7
  Top Layer w8: U2.34@1743.09,936.31 1743.09,923.53 1768.21,898.41 1840.33,898.41 2062.11,676.63 P6.24@2062.11,351.99
PE0: P7.28 U2.66 | length 1040.3
  Top Layer w8: P7.28@963.11,1836.99 963.11,1598.71 1075.03,1486.78 1457.75,1486.78 1522.62,1421.92 U2.66@1522.62,1252.67
VBAT: C12.2 D2.1 P11.3 U2.1 | length 2133.5
  Top Layer w8: C12.2@1322.64,1359.72 v2@1322.64,1333.81 ; U2.1@1460.33,1220.47 1426.54,1220.47 ; v2@1322.64,1333.81 1324.4,1332.05 v2@1324.4,1323.34 ; v2@1322.64,1333.81 1322.64,1325.1 v2@1324.4,1323.34 ; v2@1324.4,1323.34 1324.4,1315.33 1419.26,1220.47 1426.54,1220.47 ; v2@1324.4,1323.34 1333.32,1314.42 1333.32,1313.69 1426.54,1220.47
  Top Layer w30: D2.1@111,1444.91 111,1448.26 112.34,1449.6 118.13,1449.6 125.52,1456.99 P11.3@363.11,1456.99 ; C12.2@1322.64,1359.72 1324.27,1358.08 v2(1324.27,1333.81)
  Bottom Layer w30: P11.3@363.11,1456.99 317.49,1456.99 275.09,1499.38 275.09,1609.74 362.55,1697.19 626.14,1697.19 781.52,1541.81 1149.21,1541.81 1324.27,1366.74 v2(1324.27,1333.81)
VDD: C42.2 C49.2 C50.1 D2.2 P10.7 P10.8 P11.5 U2.32 U2.50 U2.68 | length 4101.1
  Top Layer w8: v2@1388.19,1319.36 1389.09,1319.36 1413.31,1295.14 1473.24,1295.14 1491.12,1277.26 ; C42.2@1391.63,1359.72 1391.63,1327.45 1416.73,1302.35 1474.36,1302.35 1491.12,1285.59 1491.12,1277.26 ; U2.68@1491.12,1252.67 1491.12,1277.26 ; U2.32@1711.59,936.31 1711.59,902.97 1730.99,883.58 1752.85,861.72 1768.61,861.72 1780.77,849.56 1780.77,847.06 C50.1@1785.07,842.76 ; U2.50@1773.89,1204.72 1830.56,1204.72 v2@1850.09,1224.26
  Top Layer w30: D2.2@111.42,1354.49 360.61,1354.49 P11.5@363.11,1356.99 ; v2(1388.15,1330.94) 1388.15,1356.41 1391.46,1359.72 C42.2@1391.63,1359.72 ; C50.1@1796.06,832.76 1798.01,830.8 v2(1823.35,830.8)
  Bottom Layer w30: P11.5@363.11,1356.99 298.45,1356.99 215.97,1439.47 215.97,1639.17 325.98,1749.19 429.95,1749.19 ; 454.35,1773.59 429.95,1749.19 ; P10.7@463.11,1936.99 P10.8@463.11,1836.99 463.11,1776.5 ; v2(1388.15,1330.94) 1388.15,1418.76 1388.15,1454.53 ; 1394.66,1418.76 1430.43,1454.53 ; v2(1823.35,830.8) 1855.47,862.93 v2(1855.47,1222.74) 1899.57,1266.84 1899.57,1359.58 1804.62,1454.53 1430.43,1454.53 ; 429.95,1749.19 455.99,1749.19 ; 455.99,1749.19 490.43,1749.19 ; 455.99,1749.19 463.11,1756.3 463.11,1776.5 ; 463.11,1776.5 473.21,1766.4 490.43,1749.19 ; 490.43,1749.19 675.26,1749.19 823.54,1600.9 1241.78,1600.9 1388.15,1454.53 ; 1388.15,1454.53 1430.43,1454.53
VDDA: C13.1 R19.2 U2.13 | length 549
  Top Layer w8: C13.1@1279.44,838.93 1279.44,878.99 ; 1279.44,884.94 1279.44,878.99 ; C13.1@1280.44,840.93 C13.1@1272.27,832.76 1272.27,878.76 1363.9,970.4 ; U2.13@1460.33,1031.5 1425,1031.5 1363.9,970.4 ; 1279.44,878.99 1363.9,963.45 1363.9,970.4
  Top Layer w30: C13.1@1272.27,832.76 R19.2@1339.92,832.76
VIO: C5.2 C45.1 C47.1 C48.1 P11.1 R19.1 S4.1 U2.17 U2.31 U2.51 U2.67 | length 6987.7
  Top Layer w6: U2.51@1773.89,1220.47 1796.47,1220.47 1847.99,1271.99 1847.99,1294.4 v2@1847.9,1294.49
  Top Layer w8: U2.17@1448.58,968.44 1438.79,958.65 1438.79,900.92 1449.92,889.79 v2(1449.92,862.27) C48.1@1449.92,842.76 ; v2(1480.05,1353.38) 1506.87,1326.57 U2.67@1506.87,1252.67 ; U2.31@1695.85,936.31 1695.85,877.21 1713.61,859.44 v2(1713.61,856.74) ; v2@1847.9,1294.49 C45.1@1881.48,1294.49
  Top Layer w30: v2(1320,740) v2@1331.29,740 ; R19.1@1339.92,772.13 1340.91,772.13 1344.21,768.82 v2@1344.21,752.92 ; C47.1@1461.63,1359.72 1464.94,1356.41 1477.02,1356.41 v2(1480.05,1353.38) ; v2(1713.61,856.74) 1713.61,851.25 1721.77,843.1 1721.77,836.06 1725.07,832.76 C5.2@1726.06,832.76 ; v2(1847.99,1295.48) 1872.75,1295.48 1876.72,1299.44 1881.57,1294.59 C45.1@1881.48,1294.49 ; v2(2302.3,148.41) 2343.62,148.41 v2@2344.11,148.9 ; v2(2342.37,148.1) 2416.25,74.22 2941.6,74.22 3042,174.61 S4.1@3042,215.99 ; v2@1331.29,740 v2@1344.21,752.92 ; v2@1331.29,740 1346.65,740 v2(1351.9,745.24) v2@1344.21,752.92
  Bottom Layer w30: P11.1@363.11,1556.99 366.09,1559.97 366.09,1603.81 406.76,1644.48 559.91,1644.48 722.41,1481.97 1100.84,1481.97 1246.97,1335.84 1298.25,1284.56 1450.37,1284.56 1480.05,1314.24 v2(1480.05,1353.38) 1515.17,1388.5 1797.95,1388.5 1847.99,1338.45 v2(1847.99,1295.48) 1847.99,1283.88 1798.09,1233.97 1798.09,907.14 1747.68,856.74 v2(1713.61,856.74) 1456.06,856.74 1450.52,862.27 v2(1449.92,862.27) 1449.92,851.92 1338,740 v2(1320,740) 821.79,740 716.29,634.5 716.29,281.15 849.35,148.1 v2@2302.62,148.1 ; v2(2302.3,148.41) v2@2302.62,148.1 ; v2(2342.37,148.1) v2@2302.62,148.1
X32KI: C9.2 R12.2 U2.3 Y2.1 | length 610.1
  Top Layer w8: R12.2@952.32,1301.31 963.63,1312.61 963.63,1336.28 974.2,1346.86 1063.54,1346.86 1078.32,1332.08 C9.2@1078.32,1301.31 ; C9.2@1084.89,1283.69 Y2.1@1174.48,1283.69 ; Y2.1@1174.48,1283.16 1234.05,1283.16 1328.23,1188.98 U2.3@1460.33,1188.98
X32KO: C10.2 R16.2 U2.4 Y2.2 | length 558.3
  Top Layer w8: R16.2@948.32,1185.21 962.63,1170.9 963.61,1170.9 987.73,1146.78 1039.52,1146.78 1063.64,1170.9 1064.01,1170.9 1078.32,1185.21 C10.2@1078.32,1186.19 1088.07,1195.94 1169.81,1195.94 1174.8,1190.95 1285.85,1190.95 1303.56,1173.23 U2.4@1460.33,1173.23
XI: C7.2 U2.5 Y1.1 | length 457.1
  Top Layer w8: C7.2@1029.83,1095.74 1031.09,1094.48 1115.58,1094.48 1159.23,1138.13 1272.38,1138.13 1291.73,1157.48 U2.5@1460.33,1157.48
XO: C8.2 U2.6 Y1.3 | length 502.4
  Top Layer w8: C8.2@1029.83,1000.46 1029.83,999.48 1044.14,985.17 1045.13,985.17 1065.07,965.23 1155.62,965.23 1172.73,982.34 Y1.3@1172.73,986.28 ; Y1.3@1190.39,1003.93 1190.39,1007.87 1208.04,1025.52 1209.38,1025.52 1325.59,1141.73 U2.6@1460.33,1141.73 ; Y1.3@1203.39,996.93 Y1.3@1203.39,1000.87
pads on no net: P2. P2.7 P14.A8 P14.B8 P15.A8 P15.B8 S1.0 S1.3 U1.

## Polygon pours and split planes (outlines as drawn)
GND on Top Layer "GND" (hatched 90Degree grid 8 track 8, remove dead copper, pour order 0): 0,3070.87 0,0 3543.31,0 3543.31,3070.87
GND on Bottom Layer "GND" (hatched 90Degree grid 8 track 8, remove dead copper, pour order 1): 0,3070.87 0,0 3543.31,0 3543.31,3070.87

## Keep-outs
Keep-Out Layer:
  the board outline again, w15

## Silkscreen, mask and mechanical layers (free items; w line width, h text height)
Top Overlay:
  lines w10: 244.17,531.19 244.17,1142.89
  text "ON" at 296.8,2694.87 h40
  text "OFF" at 478.68,2694.87 h40
  text "SWCK" at 741.59,2143.33 h35 r270
  text "PA14" at 1538.83,2135.33 h35 r270
  text "PC12" at 1338.81,2133.66 h35 r270
  text "PC10" at 1438.82,2133.66 h35 r270
  text "PA12" at 1638.84,2133.66 h35 r270
  text "PA10" at 1738.84,2133.66 h35 r270
  text "PB14" at 2138.88,2131.66 h35 r270
  text "PB12" at 2238.89,2130 h35 r270
  text "SWIO" at 641.72,2119.17 h35 r270
  text "PA8" at 1838.85,2108 h35 r270
  text "PC8" at 1938.86,2108 h35 r270
  text "PC6" at 2038.87,2106.34 h35 r270
  text "PB7" at 1038.78,2104.34 h35 r270
  text "PB5" at 1138.79,2104.34 h35 r270
  text "PB3" at 1238.8,2104.34 h35 r270
  text "GND" at 541.85,2103 h35 r270
  text "PB9" at 938.77,2102.67 h35 r270
  text "VDD" at 441.98,2099.34 h35 r270
  text "5V" at 342.11,2071.51 h35 r270
  text "CH32V30xW-R0-1v0" at 2729.47,2059.24 h40
  text "5V" at 337.89,1778.86 h35 r270
  text "VDD" at 438.81,1778.86 h35 r270
  text "GND" at 539.74,1778.86 h35 r270
  text "RXD" at 640.66,1778.86 h35 r270
  text "TXD" at 741.59,1778.86 h35 r270
  text "PE0" at 938.77,1769.36 h35 r270
  text "PB8" at 1038.78,1769.36 h35 r270
  text "PB6" at 1138.79,1769.36 h35 r270
  text "PB4" at 1238.8,1769.36 h35 r270
  text "PD2" at 1338.81,1769.36 h35 r270
  text "PC11" at 1438.82,1769.36 h35 r270
  text "PA15" at 1538.83,1769.36 h35 r270
  text "PA13" at 1638.84,1769.36 h35 r270
  text "PA11" at 1738.84,1769.36 h35 r270
  text "PA9" at 1838.85,1769.36 h35 r270
  text "PC9" at 1938.86,1769.36 h35 r270
  text "PC7" at 2038.87,1769.36 h35 r270
  text "PB15" at 2138.88,1769.36 h35 r270
  text "PB13" at 2238.89,1769.36 h35 r270
  text "VIO" at 214.94,1534.36 h35
  text "3V3" at 538.42,1534.36 h35
  text "VBAT" at 159.62,1433.26 h35
  text "3V3" at 538.42,1433.26 h35
  text "VDD" at 194.45,1332.16 h35
  text "3V3" at 538.42,1332.16 h35
  text "GND" at 192.27,1163.19 h35
  text "GND" at 536.58,1163.19 h35
  text "GND" at 536.58,1062.93 h35
  text "5V" at 552.33,962.66 h35
  text "ELED2" at 3280.82,948.94 h35 r270
  text "ELED1" at 3181.68,933.94 h35 r270
  text "GND" at 3079.53,904.95 h35 r270
  text "5V" at 552.33,862.4 h35
  text "5V" at 552.33,762.13 h35
  text "3V3" at 538.42,661.87 h35
  text "LED1" at 3079.53,582 h35 r270
  text "LED2" at 3181.68,582 h35 r270
  text "KEY" at 3280.82,582 h35 r270
  text "BOOT1" at 2137.67,572.84 h35 r270
  text "3V3" at 538.42,561.6 h35
  text "PC14" at 937.36,552.84 h35 r270
  text "PB11" at 1937.62,532.51 h35 r270
  text "PA4" at 1437.49,527.18 h35 r270
  text "PC4" at 1637.54,527.18 h35 r270
  text "PC0" at 1037.38,525.52 h35 r270
  text "PC2" at 1137.41,525.52 h35 r270
  text "PA0" at 1237.43,525.52 h35 r270
  text "PA2" at 1337.46,525.52 h35 r270
  text "GND" at 2237.7,525.52 h35 r270
  text "PA6" at 1537.51,523.85 h35 r270
  text "PB0" at 1737.57,521.85 h35 r270
  text "PB2" at 1837.59,521.85 h35 r270
  text "PD9" at 2037.64,520.18 h35 r270
  text "GND" at 192.27,461.34 h35
  text "3V3" at 538.42,461.34 h35
  text "PC13" at 937.36,186.37 h35 r270
  text "PC15" at 1037.38,186.37 h35 r270
  text "PC1" at 1137.41,186.37 h35 r270
  text "PC3" at 1237.43,186.37 h35 r270
  text "PA1" at 1337.46,186.37 h35 r270
  text "PA3" at 1437.49,186.37 h35 r270
  text "PA5" at 1537.51,186.37 h35 r270
  text "PA7" at 1637.54,186.37 h35 r270
  text "PC5" at 1737.57,186.37 h35 r270
  text "PB1" at 1837.59,186.37 h35 r270
  text "PB10" at 1937.62,186.37 h35 r270
  text "PD8" at 2037.64,186.37 h35 r270
  text "BOOT0" at 2137.67,186.37 h35 r270
  text "GND" at 2237.7,186.37 h35 r270
Mechanical 1:
  the board outline again, w10

## Text inside footprints (layer, text, board x,y; h text height)
D1: Top Overlay "+" at 629.63,2565.02 h40 r90
D3: Top Overlay "+" at 2747.03,733 h40 r90
D4: Top Overlay "+" at 2747.03,643 h40 r90
P4: Top Overlay "D-" at 2594,2698.25 h40 r180; Top Overlay "D+" at 2504,2698.25 h40 r180; Top Overlay "V" at 2674,2698.25 h40 r180; Top Overlay "G" at 2394,2698.25 h40 r180
P5: Top Overlay "D-" at 1829,2698.25 h40 r180; Top Overlay "D+" at 1739,2698.25 h40 r180; Top Overlay "V" at 1909,2698.25 h40 r180; Top Overlay "G" at 1629,2698.25 h40 r180